# Altium PCB An toan tia lua 2.PcbDoc
Units mil, origin at the board's own origin, x right, y up, seen from the top; angles counter-clockwise.
Board outline 1790 x 1645 mil, 2 copper layers (Top Layer, Bottom Layer); 10 components, 12 nets, 46 pads, 0 vias.
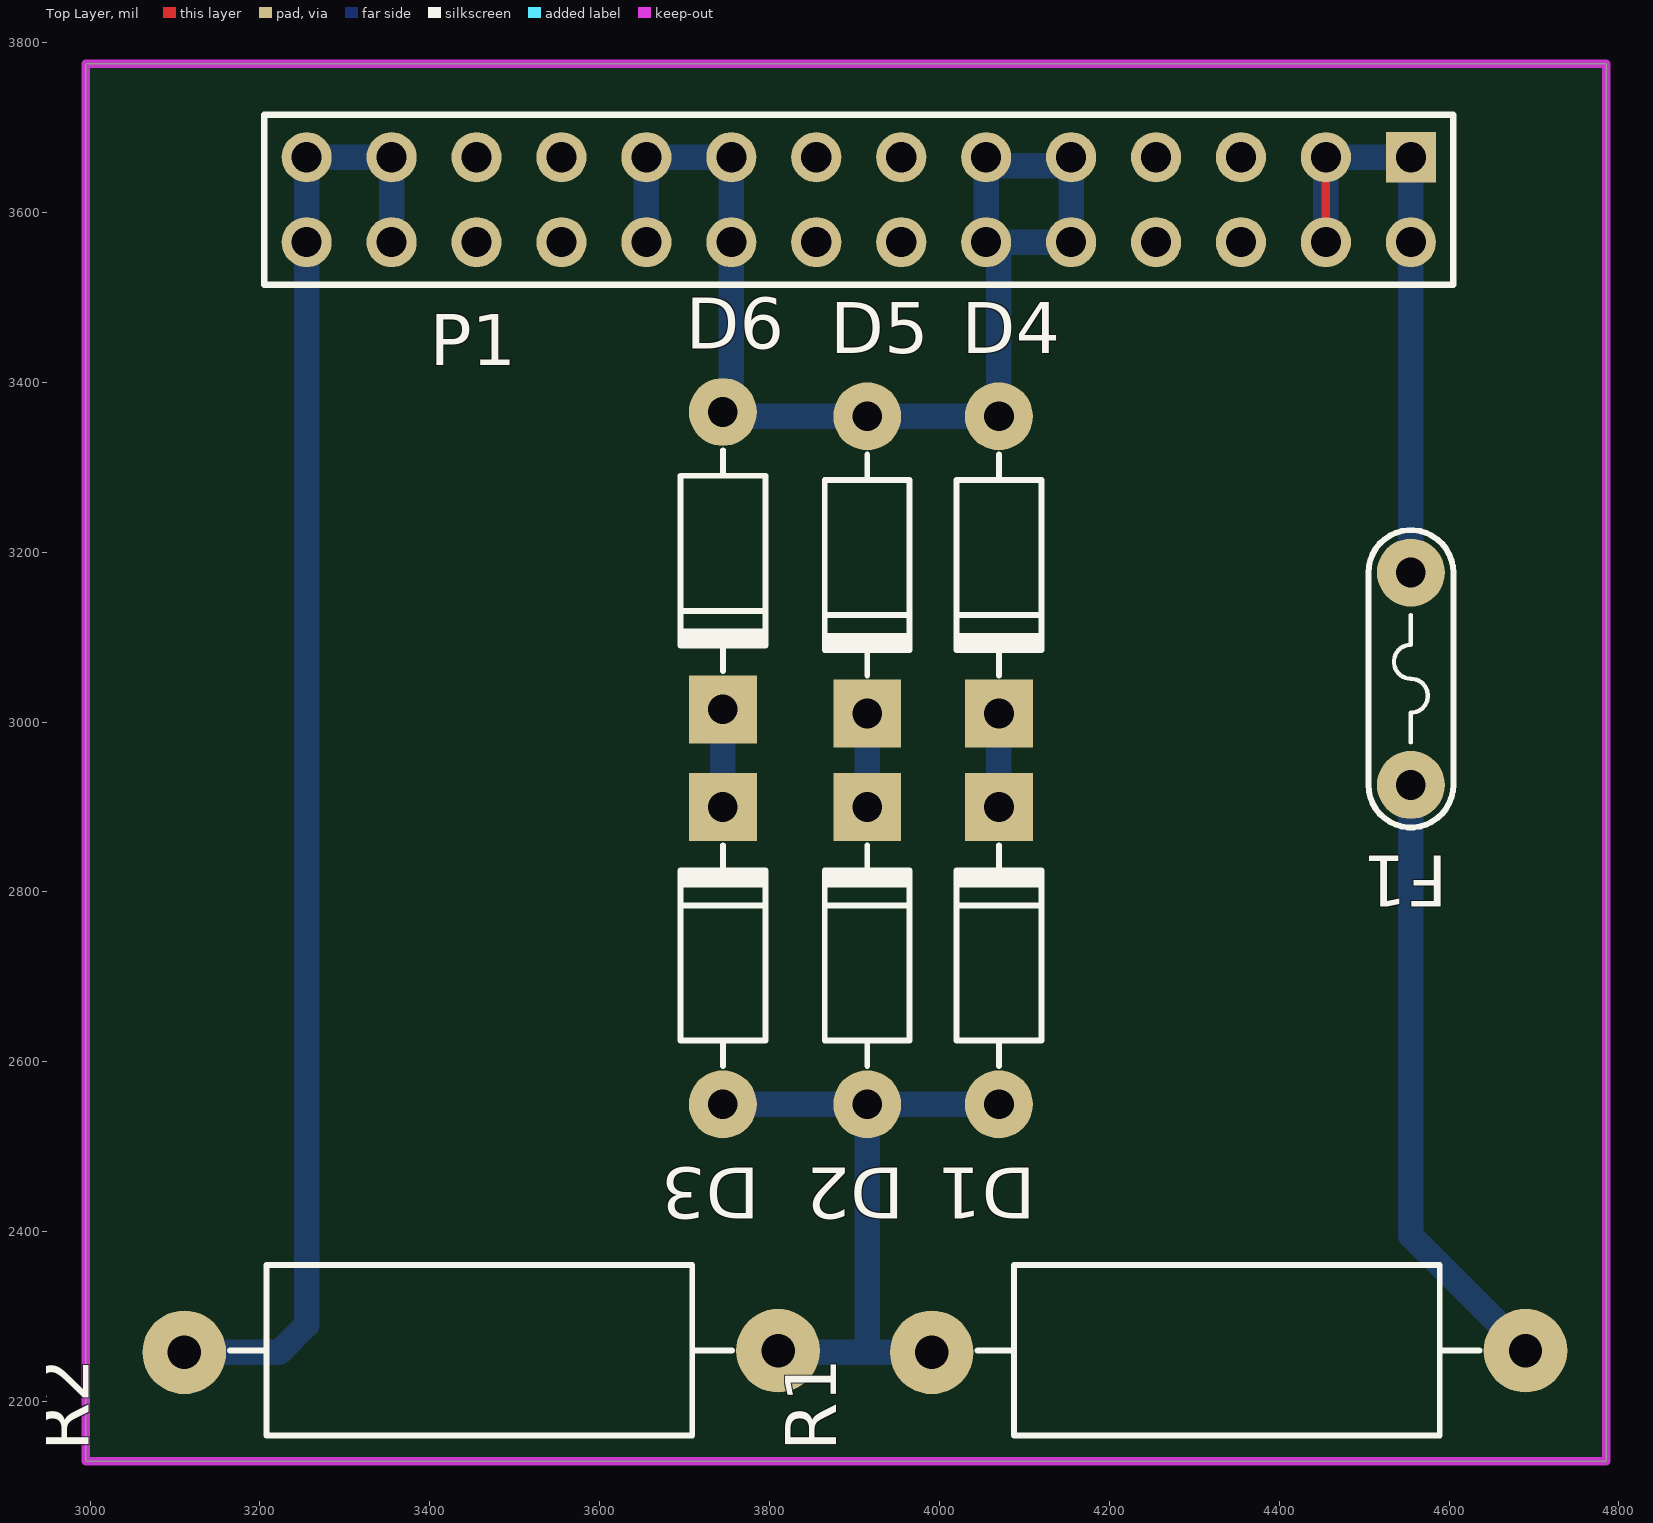
[diagram p0: Top Layer view]
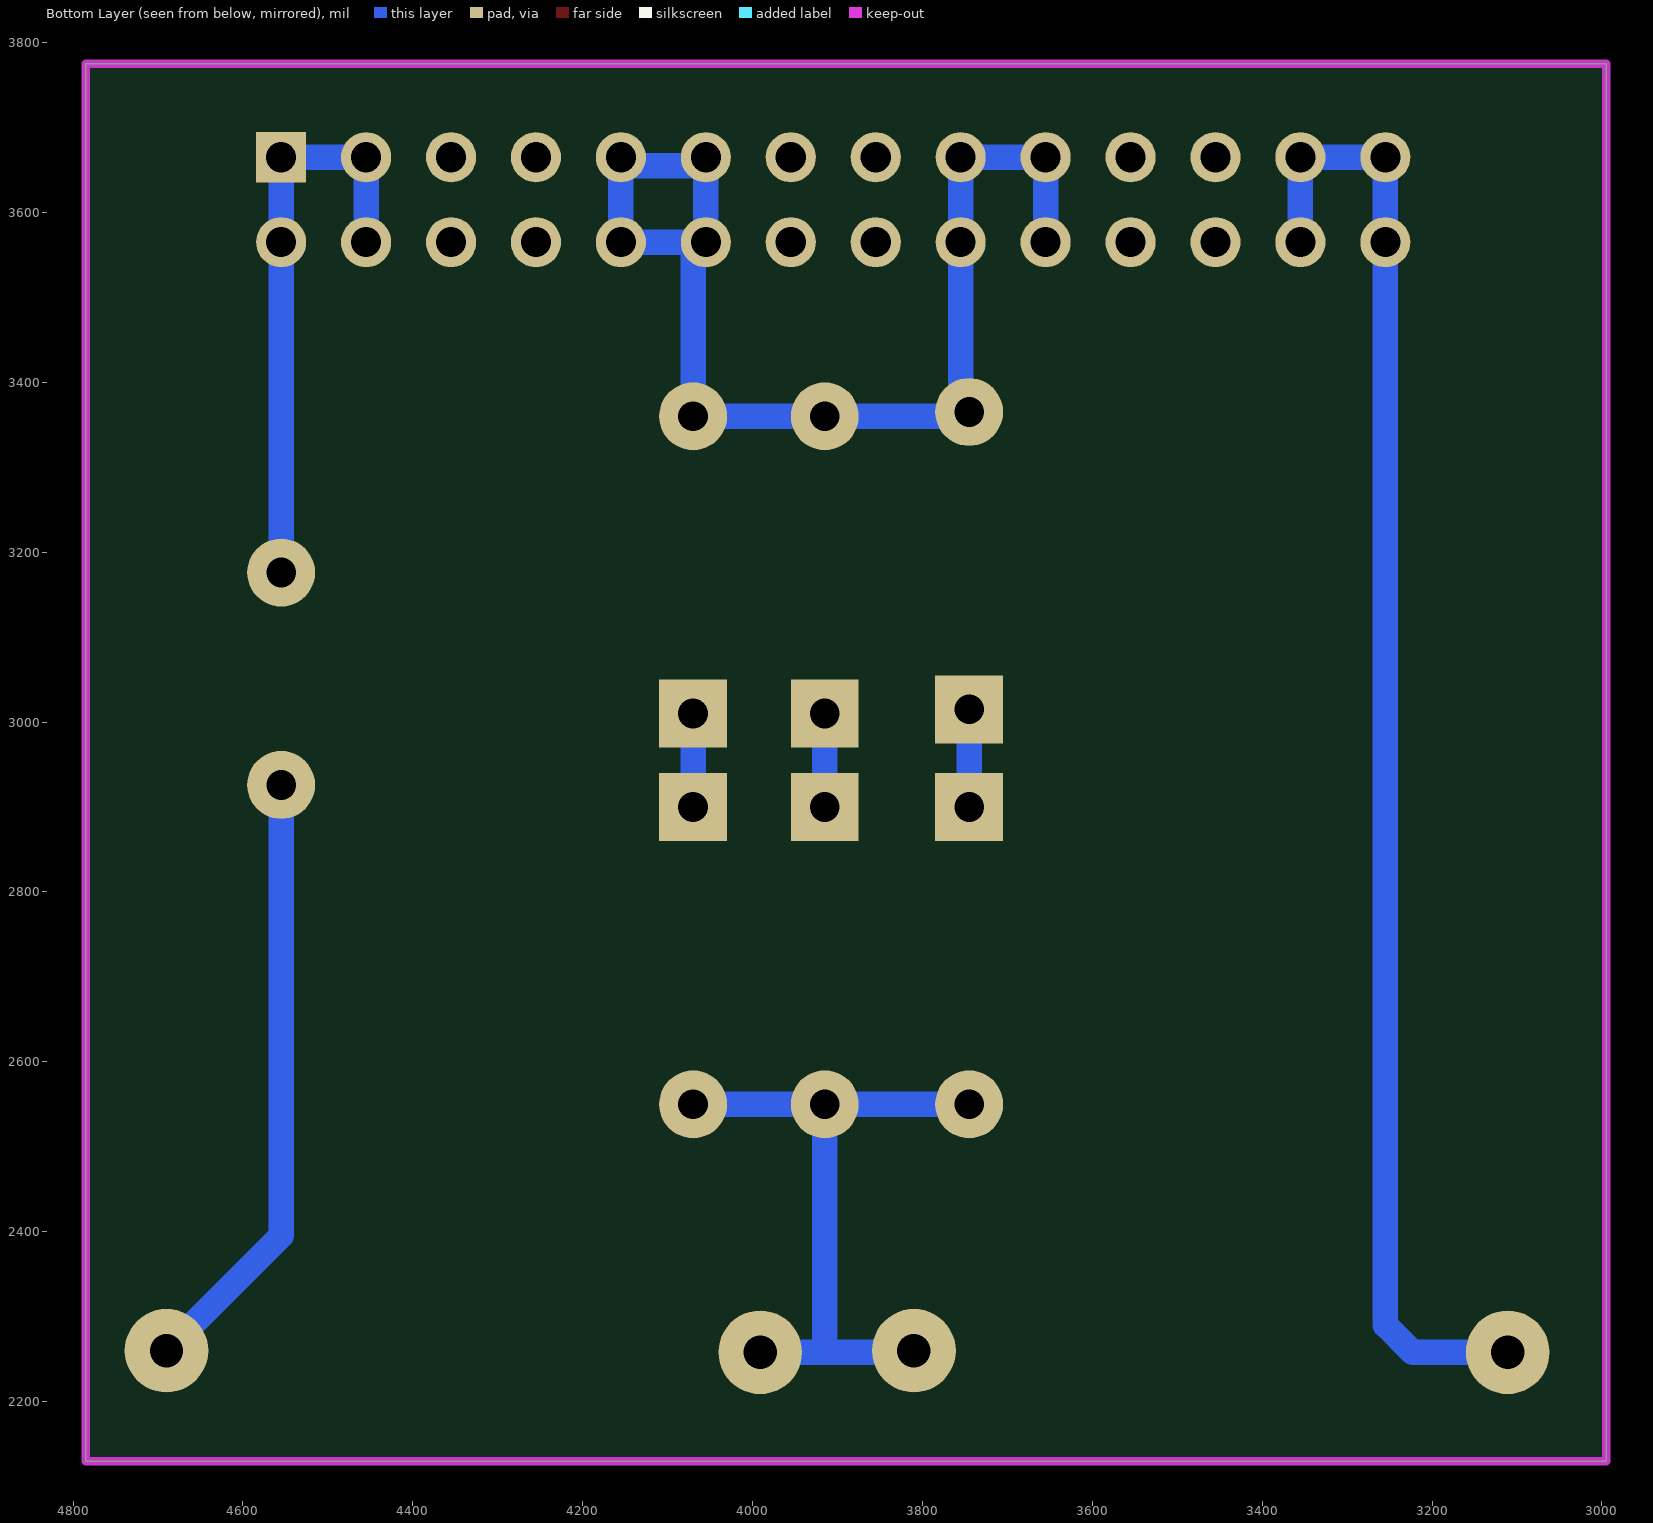
[diagram p1: Bottom Layer view, seen from below]
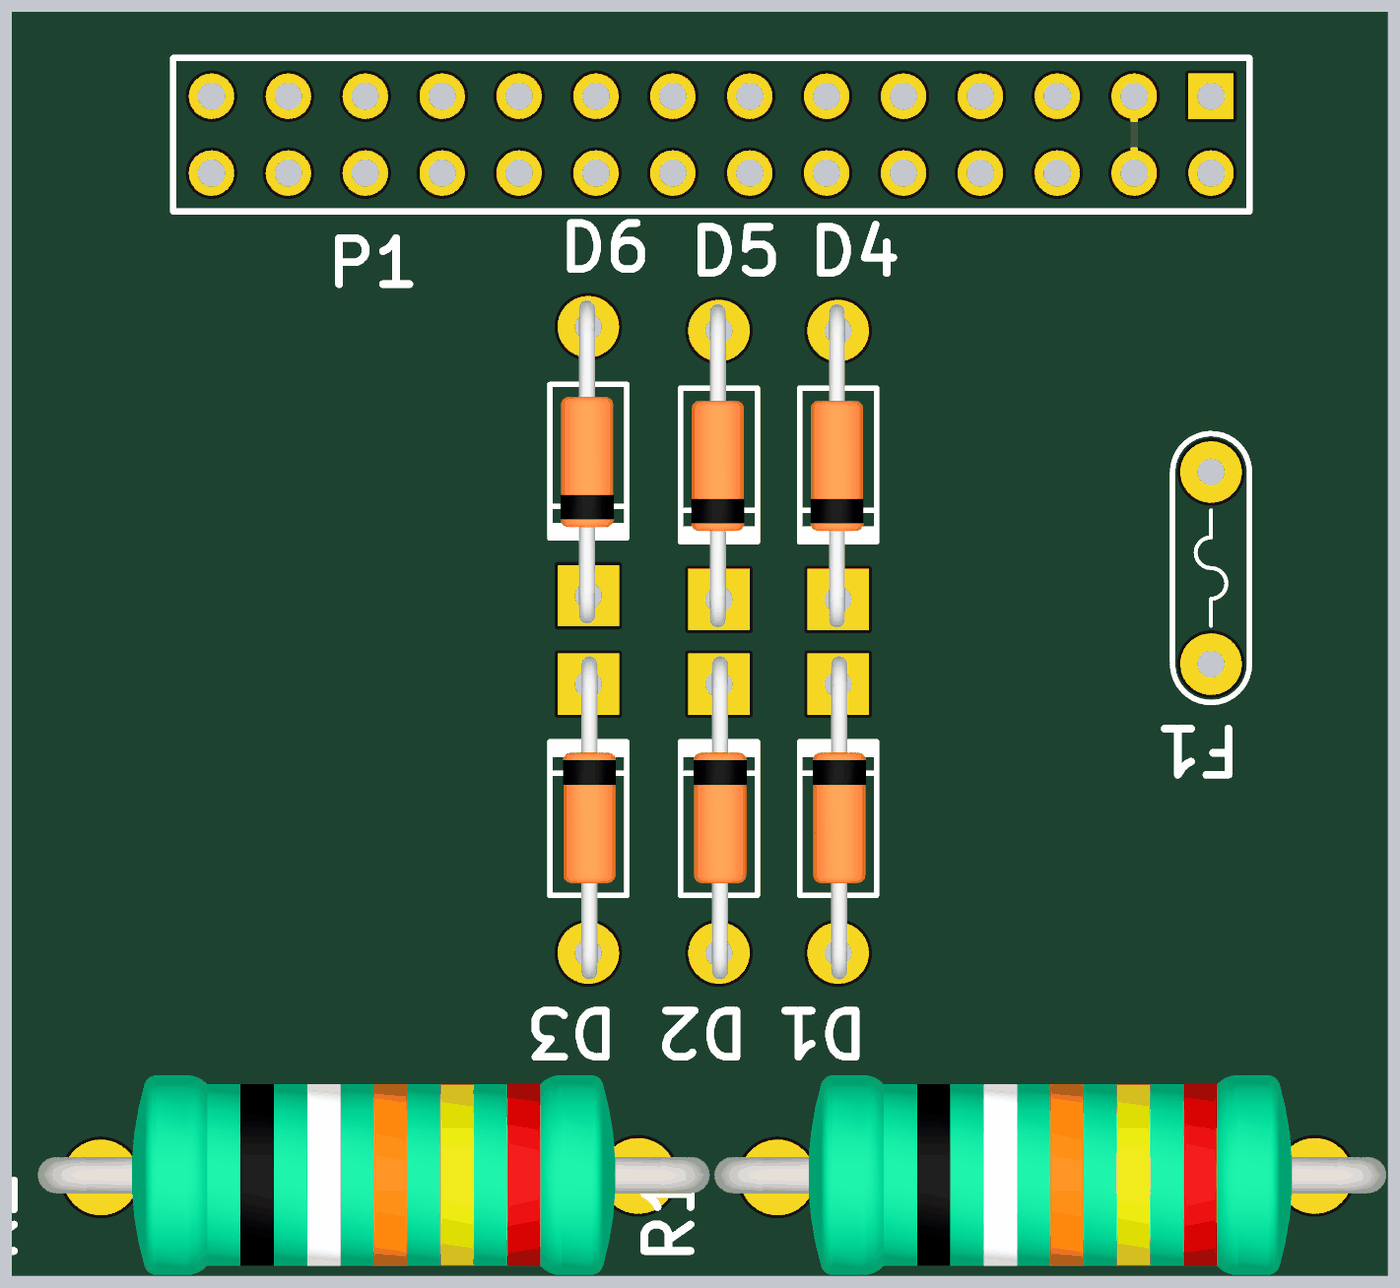
[diagram p2: 3D render of the assembled board from above, using the file's embedded part models]

## Layer stack, top to bottom
Top Solder: solder mask 0.4, Solder Resist, Dk 3.5
Top Layer: signal copper 1.4
Dielectric 1: dielectric 12.6, FR-4, Dk 4.8
Bottom Layer: signal copper 1.4
Bottom Solder: solder mask 0.4, Solder Resist, Dk 3.5

## Board outline
2995,2130 2995,3775 4785,3775 4785,2130

## Design rules (kind name [scope] priority, off if disabled: settings)
Clearance [All] p1: gap=10
PolygonConnect [All] p1: connectstyle=Relief reliefconductorwidth=10 reliefentries=4 polygonreliefangle="90 Angle" airgapwidth=10
RoutingVias [All] p1: holewidth=28 width=50 viastyle="Through Hole" minholewidth=28 minwidth=50 maxholewidth=28 maxwidth=50
SolderMaskExpansion [All] p1: expansion=4
Width [All] p1: maxlimit=100 minlimit=10 preferedwidth=30
30 further rules are at their usual default settings.

## Components (designator, comment, footprint, x,y, rotation, side; value= is the part's Value field where it differs from the comment)
D1 "15KE12" D1A 4070,2550 r270 top
D2 "15KE12" D1A 3915,2550 r270 top
D3 "15KE12" D1A 3745,2550 r270 top
D4 "15KE12" D1A 4070,3360 r90 top
D5 "15KE12" D1A 3915,3360 r90 top
D6 "15KE12" D1A 3745,3365 r90 top
F1 "F1A" Fuse 4555,3175 r270 top
P1 "Header 14X2" HDR2X14 4555,3665 r180 top
R1 "3.3" R2W 4690,2260 r180 top
R2 "2.2" R2W 3810,2260 r180 top

## Footprints (in the part's own frame and the unit in brackets; to place one, negate y for a bottom-side part, rotate by r counter-clockwise, add the part's x,y. Pads: shape width x height; smd on the part's side, far side on the other; paste and mask are expansions set on the pad)
D1A [mil] "Diode 1A, W 100mil, L 350mil"
  round 80 hole 35: 1(0,0)
  rect 80x80 hole 35: 2(-350,0)
  silkscreen extent -305,-50 -45,50, body extent -386,-33 34,36, height 84
Fuse [mil]
  round 80 hole 35: 1(-1,0) 2(249,0)
  silkscreen extent -51,-50 299,50
HDR2X14 [mm] "Connector; Header; 14x2 Position"
  rect 1.5x1.5 hole 0.9: 1(0,0)
  round 1.5 hole 0.9: 2(0,2.54) 3(2.54,0) 4(2.54,2.54) 5(5.08,0) 6(5.08,2.54) 7(7.62,0) 8(7.62,2.54) 9(10.16,0) 10(10.16,2.54) 11(12.7,0) 12(12.7,2.54) 13(15.24,0) 14(15.24,2.54) 15(17.78,0) 16(17.78,2.54) 17(20.32,0) 18(20.32,2.54) 19(22.86,0) 20(22.86,2.54) 21(25.4,0) 22(25.4,2.54) 23(27.94,0) 24(27.94,2.54) 25(30.48,0) 26(30.48,2.54) 27(33.02,0) 28(33.02,2.54)
  silkscreen extent -1.27,-1.27 34.29,3.81
R2W [mm] "R2W, 2 pin, 700mil"
  round 2.5 hole 1: 1(0,0) 2(17.755,0.051)
  silkscreen extent 1.37,-2.57 16.38,2.54, body extent -2.36,-3.33 19.84,3.27, height 8.3

## Part data
D1 D2 D3 D4 D5 D6: library part Zener
F1: library part Fuse, "Fuse"
P1: "Header, 14-Pin, Dual row"
R1 R2: library part R2W, "Resistor 2W"

## Nets (pads, with @x,y where several pads share a name; then routed paths per layer and width w, separated by ;. In a path a pad name is that pad's centre, name@x,y a point inside that pad or via, vN(x,y) a via of type N, cw(c..) or ccw(c..) an arc to the next point about the centre after c; other vN are vias at no path point)
LINE1+: P1.25 P1.26 P1.27 P1.28 R2.2 | length 1732.3
  Bottom Layer w30: R2.2 3223,2258 3255,2290 P1.28 P1.27 P1.25 P1.26
LINE1-: D4.1 D5.1 D6.1 P1.9 P1.10 P1.11 P1.12 P1.17 P1.18 P1.19 P1.20 | length 1431.6
  Bottom Layer w30: P1.20 P1.19 P1.17 P1.18 3755,3375 3770,3360 D5.1 D4.1 4070,3550 P1.12 ; P1.11@4050,3655 P1.11@4055,3655 ; P1.11 P1.11@4055,3655 ; P1.12 P1.11@4055,3655 ; P1.12 P1.10 P1.9 4145,3655 P1.11@4055,3655
LINE+: F1.1 P1.1 P1.2 P1.3 P1.4 | length 789
  Top Layer w10: P1.4 P1.3
  Bottom Layer w30: P1.4 P1.3 P1.1 P1.2 F1.1
NetD1_1: D1.1 D2.1 D3.1 R1.2 R2.1 | length 791
  Bottom Layer w30: D3.1 D2.1 ; R2.1@3812,2258 R1.2 ; 3915,2263 D2.1 ; D1.1 D2.1
NetD1_2: D1.2 D4.2 | length 110
  Bottom Layer w30: D1.2 D4.2
NetD2_2: D2.2 D5.2 | length 110
  Bottom Layer w30: D2.2 D5.2
NetD3_2: D3.2 D6.2 | length 115
  Bottom Layer w30: D3.2 D6.2
NetF1_2: F1.2 R1.1 | length 721.9
  Bottom Layer w30: F1.2 4555,2395 R1.1
NetJP1_1: 
NetJP1_2: 
NetJP2_1: 
NetJP2_2: 
pads on no net: P1.5 P1.6 P1.7 P1.8 P1.13 P1.14 P1.15 P1.16 P1.21 P1.22 P1.23 P1.24

## Keep-outs
Keep-Out Layer:
  lines w10: 2995,2130 2995,3775 3145,3775 4785,3775 4785,2130 2995,2130